# EAGLE board panelized (EAGLE 5.07)
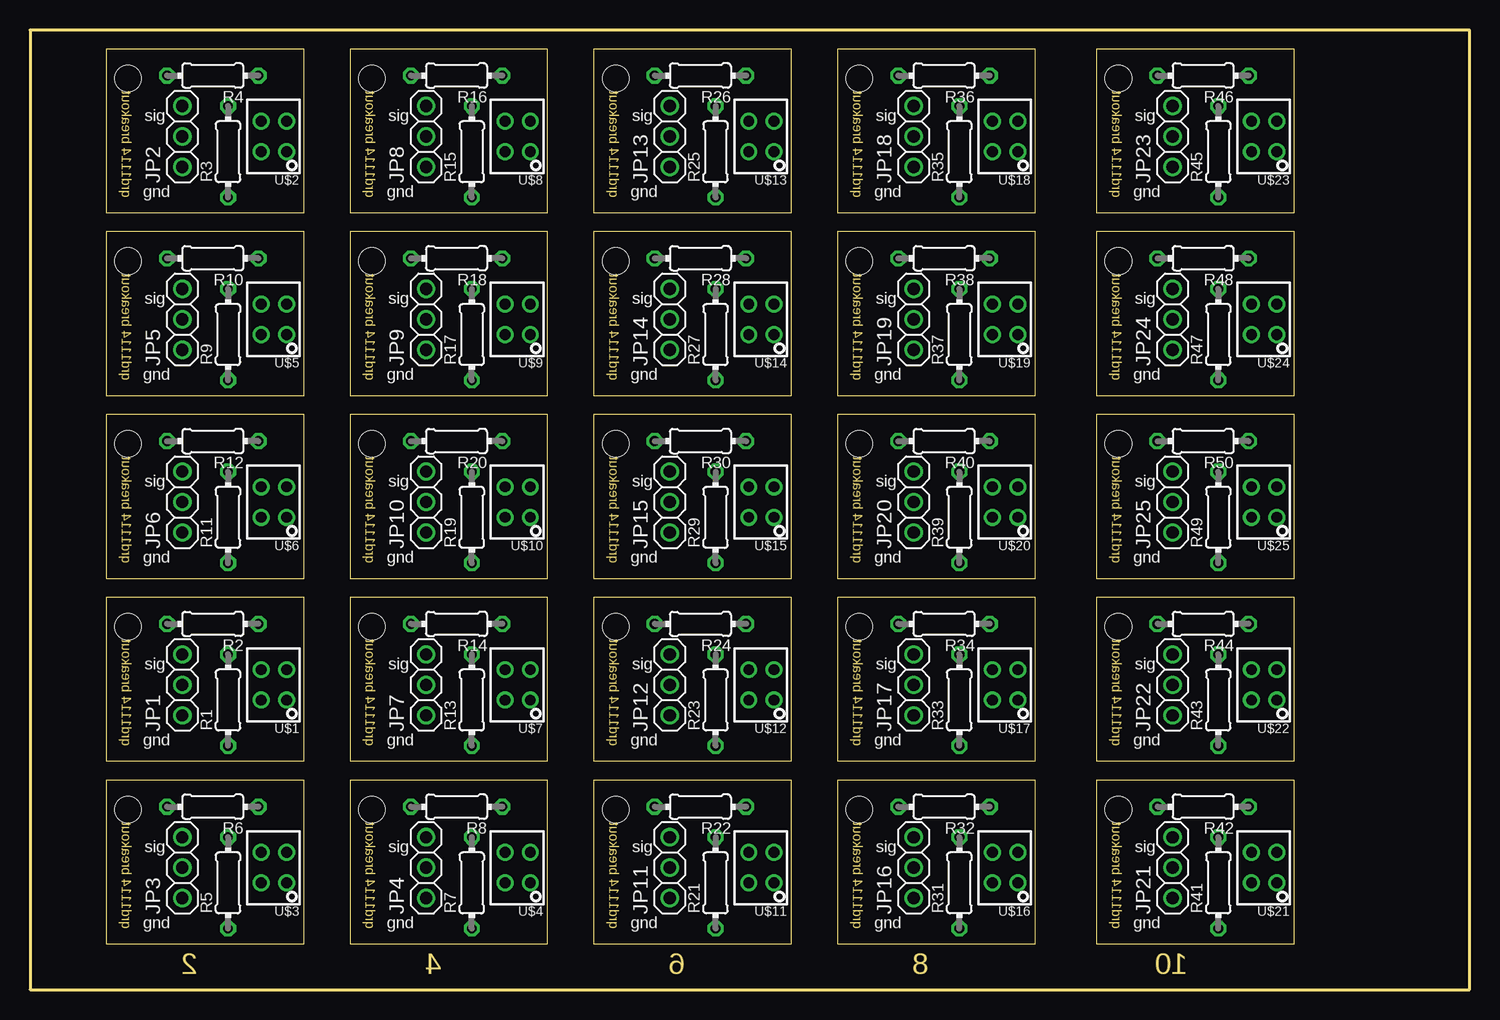
[diagram p0: board, top side]
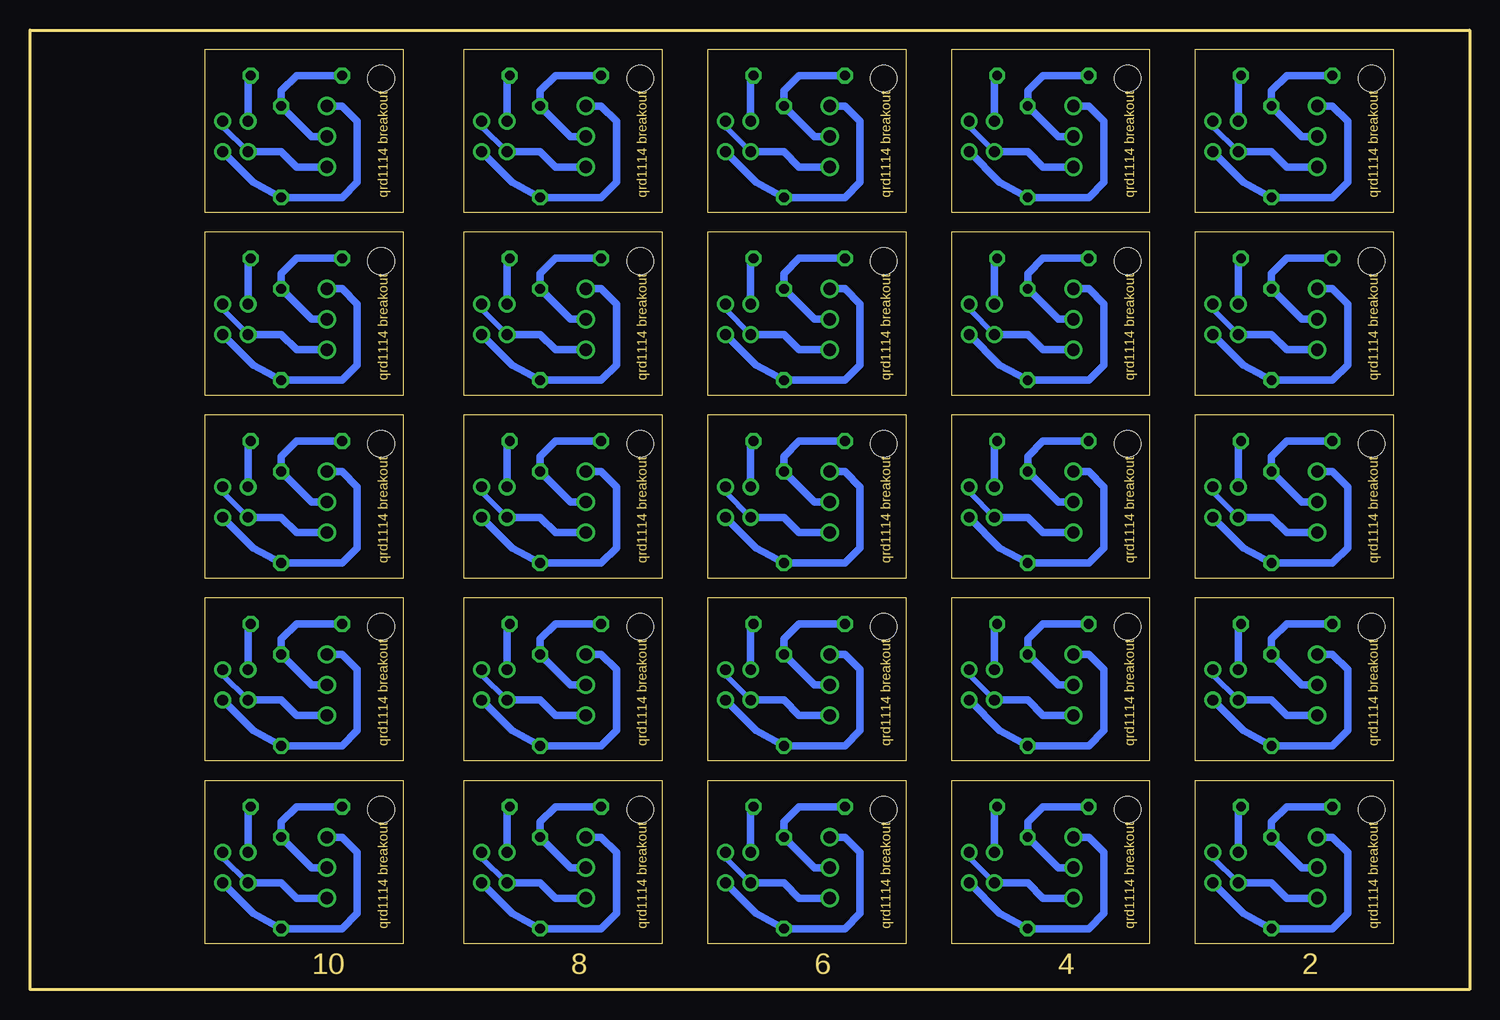
[diagram p1: board, bottom side, seen from below]

Size 120 x 80 mm. Coordinates in mm from the lower left corner, seen from the top.
Outline: 6.35,19.05 22.84,19.05 22.84,32.69 6.35,32.69 6.35,19.05
Outline: 6.35,64.77 22.84,64.77 22.84,78.41 6.35,78.41 6.35,64.77
Outline: 6.35,3.81 22.84,3.81 22.84,17.45 6.35,17.45 6.35,3.81
Outline: 26.67,3.81 43.16,3.81 43.16,17.45 26.67,17.45 26.67,3.81
Outline: 6.35,49.53 22.84,49.53 22.84,63.17 6.35,63.17 6.35,49.53
Outline: 6.35,34.29 22.84,34.29 22.84,47.93 6.35,47.93 6.35,34.29
Outline: 0,0 120,0 120,80 0,80 0,0
Outline: 26.67,19.05 43.16,19.05 43.16,32.69 26.67,32.69 26.67,19.05
Outline: 26.67,64.77 43.16,64.77 43.16,78.41 26.67,78.41 26.67,64.77
Outline: 26.67,49.53 43.16,49.53 43.16,63.17 26.67,63.17 26.67,49.53
Outline: 26.67,34.29 43.16,34.29 43.16,47.93 26.67,47.93 26.67,34.29
Outline: 46.99,3.81 63.48,3.81 63.48,17.45 46.99,17.45 46.99,3.81
Outline: 46.99,19.05 63.48,19.05 63.48,32.69 46.99,32.69 46.99,19.05
Outline: 46.99,64.77 63.48,64.77 63.48,78.41 46.99,78.41 46.99,64.77
Outline: 46.99,49.53 63.48,49.53 63.48,63.17 46.99,63.17 46.99,49.53
Outline: 46.99,34.29 63.48,34.29 63.48,47.93 46.99,47.93 46.99,34.29
Outline: 67.31,3.81 83.8,3.81 83.8,17.45 67.31,17.45 67.31,3.81
Outline: 67.31,19.05 83.8,19.05 83.8,32.69 67.31,32.69 67.31,19.05
Outline: 67.31,64.77 83.8,64.77 83.8,78.41 67.31,78.41 67.31,64.77
Outline: 67.31,49.53 83.8,49.53 83.8,63.17 67.31,63.17 67.31,49.53
Outline: 67.31,34.29 83.8,34.29 83.8,47.93 67.31,47.93 67.31,34.29
Outline: 88.9,3.81 105.39,3.81 105.39,17.45 88.9,17.45 88.9,3.81
Outline: 88.9,19.05 105.39,19.05 105.39,32.69 88.9,32.69 88.9,19.05
Outline: 88.9,64.77 105.39,64.77 105.39,78.41 88.9,78.41 88.9,64.77
Outline: 88.9,49.53 105.39,49.53 105.39,63.17 88.9,63.17 88.9,49.53
Outline: 88.9,34.29 105.39,34.29 105.39,47.93 88.9,47.93 88.9,34.29
Copper layers (1*16): Top 0.035mm / dielectric 1.5mm / Bottom 0.035mm
Design rules "default": minimum track width 10mil, minimum drill 24mil, track to track 8mil, track to pad 8mil, pad to pad 8mil, via to via 8mil, smd to smd 8mil, copper to edge 40mil, drill to drill 8mil, minimum pad ring 10mil, minimum via ring 8mil, stop-mask expansion 4mil, vias tented up to drill 0mil, thermal gap 10mil
Holes 2.2 mm at 8.18,30.25 8.18,75.97 8.18,15.01 28.5,15.01 8.18,60.73 8.18,45.49 28.5,30.25 28.5,75.97 28.5,60.73 28.5,45.49 48.82,15.01 48.82,30.25 48.82,75.97 48.82,60.73 48.82,45.49 69.14,15.01 69.14,30.25 69.14,75.97 69.14,60.73 69.14,45.49 90.73,15.01 90.73,30.25 90.73,75.97 90.73,60.73 90.73,45.49

## Footprints (pad centres in the part's own frame; a part is rotated, then mirrored left to right if it is on the bottom)
1X03 = drill 1.016 round: 1 -2.54,0; 2 0,0; 3 2.54,0
0204/7 = drill 0.813 octagon: 1 -3.81,0; 2 3.81,0
QRD1114 = drill 0.9 round: 1 -1.067,1.27; 2 -1.067,-1.27; 3 1.041,-1.27; 4 1.041,1.27

## Placement (x,y rotation side)
JP1  [1X03]  12.7,25.4 90 top
JP2  [1X03]  12.7,71.12 90 top
JP3  [1X03]  12.7,10.16 90 top
JP4  [1X03]  33.02,10.16 90 top
JP5  [1X03]  12.7,55.88 90 top
JP6  [1X03]  12.7,40.64 90 top
JP7  [1X03]  33.02,25.4 90 top
JP8  [1X03]  33.02,71.12 90 top
JP9  [1X03]  33.02,55.88 90 top
JP10  [1X03]  33.02,40.64 90 top
JP11  [1X03]  53.34,10.16 90 top
JP12  [1X03]  53.34,25.4 90 top
JP13  [1X03]  53.34,71.12 90 top
JP14  [1X03]  53.34,55.88 90 top
JP15  [1X03]  53.34,40.64 90 top
JP16  [1X03]  73.66,10.16 90 top
JP17  [1X03]  73.66,25.4 90 top
JP18  [1X03]  73.66,71.12 90 top
JP19  [1X03]  73.66,55.88 90 top
JP20  [1X03]  73.66,40.64 90 top
JP21  [1X03]  95.25,10.16 90 top
JP22  [1X03]  95.25,25.4 90 top
JP23  [1X03]  95.25,71.12 90 top
JP24  [1X03]  95.25,55.88 90 top
JP25  [1X03]  95.25,40.64 90 top
R1  5.6k  [0204/7]  16.51,24.13 90 top
R2  200ohm  [0204/7]  15.24,30.48 180 top
R3  5.6k  [0204/7]  16.51,69.85 90 top
R4  200ohm  [0204/7]  15.24,76.2 180 top
R5  5.6k  [0204/7]  16.51,8.89 90 top
R6  200ohm  [0204/7]  15.24,15.24 180 top
R7  5.6k  [0204/7]  36.83,8.89 90 top
R8  200ohm  [0204/7]  35.56,15.24 180 top
R9  5.6k  [0204/7]  16.51,54.61 90 top
R10  200ohm  [0204/7]  15.24,60.96 180 top
R11  5.6k  [0204/7]  16.51,39.37 90 top
R12  200ohm  [0204/7]  15.24,45.72 180 top
R13  5.6k  [0204/7]  36.83,24.13 90 top
R14  200ohm  [0204/7]  35.56,30.48 180 top
R15  5.6k  [0204/7]  36.83,69.85 90 top
R16  200ohm  [0204/7]  35.56,76.2 180 top
R17  5.6k  [0204/7]  36.83,54.61 90 top
R18  200ohm  [0204/7]  35.56,60.96 180 top
R19  5.6k  [0204/7]  36.83,39.37 90 top
R20  200ohm  [0204/7]  35.56,45.72 180 top
R21  5.6k  [0204/7]  57.15,8.89 90 top
R22  200ohm  [0204/7]  55.88,15.24 180 top
R23  5.6k  [0204/7]  57.15,24.13 90 top
R24  200ohm  [0204/7]  55.88,30.48 180 top
R25  5.6k  [0204/7]  57.15,69.85 90 top
R26  200ohm  [0204/7]  55.88,76.2 180 top
R27  5.6k  [0204/7]  57.15,54.61 90 top
R28  200ohm  [0204/7]  55.88,60.96 180 top
R29  5.6k  [0204/7]  57.15,39.37 90 top
R30  200ohm  [0204/7]  55.88,45.72 180 top
R31  5.6k  [0204/7]  77.47,8.89 90 top
R32  200ohm  [0204/7]  76.2,15.24 180 top
R33  5.6k  [0204/7]  77.47,24.13 90 top
R34  200ohm  [0204/7]  76.2,30.48 180 top
R35  5.6k  [0204/7]  77.47,69.85 90 top
R36  200ohm  [0204/7]  76.2,76.2 180 top
R37  5.6k  [0204/7]  77.47,54.61 90 top
R38  200ohm  [0204/7]  76.2,60.96 180 top
R39  5.6k  [0204/7]  77.47,39.37 90 top
R40  200ohm  [0204/7]  76.2,45.72 180 top
R41  5.6k  [0204/7]  99.06,8.89 90 top
R42  200ohm  [0204/7]  97.79,15.24 180 top
R43  5.6k  [0204/7]  99.06,24.13 90 top
R44  200ohm  [0204/7]  97.79,30.48 180 top
R45  5.6k  [0204/7]  99.06,69.85 90 top
R46  200ohm  [0204/7]  97.79,76.2 180 top
R47  5.6k  [0204/7]  99.06,54.61 90 top
R48  200ohm  [0204/7]  97.79,60.96 180 top
R49  5.6k  [0204/7]  99.06,39.37 90 top
R50  200ohm  [0204/7]  97.79,45.72 180 top
U$1  QRD1114  [QRD1114]  20.32,25.4 180 top
U$2  QRD1114  [QRD1114]  20.32,71.12 180 top
U$3  QRD1114  [QRD1114]  20.32,10.16 180 top
U$4  QRD1114  [QRD1114]  40.64,10.16 180 top
U$5  QRD1114  [QRD1114]  20.32,55.88 180 top
U$6  QRD1114  [QRD1114]  20.32,40.64 180 top
U$7  QRD1114  [QRD1114]  40.64,25.4 180 top
U$8  QRD1114  [QRD1114]  40.64,71.12 180 top
U$9  QRD1114  [QRD1114]  40.64,55.88 180 top
U$10  QRD1114  [QRD1114]  40.64,40.64 180 top
U$11  QRD1114  [QRD1114]  60.96,10.16 180 top
U$12  QRD1114  [QRD1114]  60.96,25.4 180 top
U$13  QRD1114  [QRD1114]  60.96,71.12 180 top
U$14  QRD1114  [QRD1114]  60.96,55.88 180 top
U$15  QRD1114  [QRD1114]  60.96,40.64 180 top
U$16  QRD1114  [QRD1114]  81.28,10.16 180 top
U$17  QRD1114  [QRD1114]  81.28,25.4 180 top
U$18  QRD1114  [QRD1114]  81.28,71.12 180 top
U$19  QRD1114  [QRD1114]  81.28,55.88 180 top
U$20  QRD1114  [QRD1114]  81.28,40.64 180 top
U$21  QRD1114  [QRD1114]  102.87,10.16 180 top
U$22  QRD1114  [QRD1114]  102.87,25.4 180 top
U$23  QRD1114  [QRD1114]  102.87,71.12 180 top
U$24  QRD1114  [QRD1114]  102.87,55.88 180 top
U$25  QRD1114  [QRD1114]  102.87,40.64 180 top

## Library data of the parts
JP1-JP25 = adafruit
R1-R50 = resistor
U$1-U$25 = SparkFun

## Nets
GND: JP1.1 U$1.2 U$1.4
GND1: JP2.1 U$2.2 U$2.4
GND2: JP3.1 U$3.2 U$3.4
GND3: JP4.1 U$4.2 U$4.4
GND4: JP5.1 U$5.2 U$5.4
GND5: JP6.1 U$6.2 U$6.4
GND6: JP7.1 U$7.2 U$7.4
GND7: JP8.1 U$8.2 U$8.4
GND8: JP9.1 U$9.2 U$9.4
GND9: JP10.1 U$10.2 U$10.4
GND10: JP11.1 U$11.2 U$11.4
GND11: JP12.1 U$12.2 U$12.4
GND12: JP13.1 U$13.2 U$13.4
GND13: JP14.1 U$14.2 U$14.4
GND14: JP15.1 U$15.2 U$15.4
GND15: JP16.1 U$16.2 U$16.4
GND16: JP17.1 U$17.2 U$17.4
GND17: JP18.1 U$18.2 U$18.4
GND18: JP19.1 U$19.2 U$19.4
GND19: JP20.1 U$20.2 U$20.4
GND20: JP21.1 U$21.2 U$21.4
GND21: JP22.1 U$22.2 U$22.4
GND22: JP23.1 U$23.2 U$23.4
GND23: JP24.1 U$24.2 U$24.4
GND24: JP25.1 U$25.2 U$25.4
N$1: R2.1 U$1.3
N$2: JP1.3 R1.1 U$1.1
N$3: JP2.3 R3.1 U$2.1
N$4: R4.1 U$2.3
N$5: JP3.3 R5.1 U$3.1
N$6: R6.1 U$3.3
N$7: JP4.3 R7.1 U$4.1
N$8: R8.1 U$4.3
N$9: JP5.3 R9.1 U$5.1
N$10: R10.1 U$5.3
N$11: JP6.3 R11.1 U$6.1
N$12: R12.1 U$6.3
N$13: JP7.3 R13.1 U$7.1
N$14: R14.1 U$7.3
N$15: JP8.3 R15.1 U$8.1
N$16: R16.1 U$8.3
N$17: JP9.3 R17.1 U$9.1
N$18: R18.1 U$9.3
N$19: JP10.3 R19.1 U$10.1
N$20: R20.1 U$10.3
N$21: JP11.3 R21.1 U$11.1
N$22: R22.1 U$11.3
N$23: JP12.3 R23.1 U$12.1
N$24: R24.1 U$12.3
N$25: JP13.3 R25.1 U$13.1
N$26: R26.1 U$13.3
N$27: JP14.3 R27.1 U$14.1
N$28: R28.1 U$14.3
N$29: JP15.3 R29.1 U$15.1
N$30: R30.1 U$15.3
N$31: JP16.3 R31.1 U$16.1
N$32: R32.1 U$16.3
N$33: JP17.3 R33.1 U$17.1
N$34: R34.1 U$17.3
N$35: JP18.3 R35.1 U$18.1
N$36: R36.1 U$18.3
N$37: JP19.3 R37.1 U$19.1
N$38: R38.1 U$19.3
N$39: JP20.3 R39.1 U$20.1
N$40: R40.1 U$20.3
N$41: JP21.3 R41.1 U$21.1
N$42: R42.1 U$21.3
N$43: JP22.3 R43.1 U$22.1
N$44: R44.1 U$22.3
N$45: JP23.3 R45.1 U$23.1
N$46: R46.1 U$23.3
N$47: JP24.3 R47.1 U$24.1
N$48: R48.1 U$24.3
N$49: JP25.3 R49.1 U$25.1
N$50: R50.1 U$25.3
VCC: JP1.2 R1.2 R2.2
VCC1: JP2.2 R3.2 R4.2
VCC2: JP3.2 R5.2 R6.2
VCC3: JP4.2 R7.2 R8.2
VCC4: JP5.2 R9.2 R10.2
VCC5: JP6.2 R11.2 R12.2
VCC6: JP7.2 R13.2 R14.2
VCC7: JP8.2 R15.2 R16.2
VCC8: JP9.2 R17.2 R18.2
VCC9: JP10.2 R19.2 R20.2
VCC10: JP11.2 R21.2 R22.2
VCC11: JP12.2 R23.2 R24.2
VCC12: JP13.2 R25.2 R26.2
VCC13: JP14.2 R27.2 R28.2
VCC14: JP15.2 R29.2 R30.2
VCC15: JP16.2 R31.2 R32.2
VCC16: JP17.2 R33.2 R34.2
VCC17: JP18.2 R35.2 R36.2
VCC18: JP19.2 R37.2 R38.2
VCC19: JP20.2 R39.2 R40.2
VCC20: JP21.2 R41.2 R42.2
VCC21: JP22.2 R43.2 R44.2
VCC22: JP23.2 R45.2 R46.2
VCC23: JP24.2 R47.2 R48.2
VCC24: JP25.2 R49.2 R50.2

## Tracks (layer width: path | path; a pad name or v marks a point on that pad's centre or on a via)
GND
  Bottom 0.406: U$1.4 21.39,26.24
  Bottom 0.61: 21.39,26.24 U$1.2 | U$1.4 16.51,24.13 15.24,22.86 JP1.1
GND1
  Bottom 0.406: U$2.4 21.39,71.96
  Bottom 0.61: 21.39,71.96 U$2.2 | U$2.4 16.51,69.85 15.24,68.58 JP2.1
GND2
  Bottom 0.406: U$3.4 21.39,11
  Bottom 0.61: 21.39,11 U$3.2 | U$3.4 16.51,8.89 15.24,7.62 JP3.1
GND3
  Bottom 0.406: U$4.4 41.71,11
  Bottom 0.61: 41.71,11 U$4.2 | U$4.4 36.83,8.89 35.56,7.62 JP4.1
GND4
  Bottom 0.406: U$5.2 21.39,56.72 U$5.4
  Bottom 0.61: U$5.4 16.51,54.61 15.24,53.34 JP5.1
GND5
  Bottom 0.406: U$6.4 21.39,41.48
  Bottom 0.61: 21.39,41.48 U$6.2 | U$6.4 16.51,39.37 15.24,38.1 JP6.1
GND6
  Bottom 0.406: U$7.4 41.71,26.24
  Bottom 0.61: 41.71,26.24 U$7.2 | U$7.4 36.83,24.13 35.56,22.86 JP7.1
GND7
  Bottom 0.406: U$8.4 41.71,71.96
  Bottom 0.61: 41.71,71.96 U$8.2 | U$8.4 36.83,69.85 35.56,68.58 JP8.1
GND8
  Bottom 0.406: U$9.4 41.71,56.72
  Bottom 0.61: 41.71,56.72 U$9.2 | U$9.4 36.83,54.61 35.56,53.34 JP9.1
GND9
  Bottom 0.406: U$10.4 41.71,41.48
  Bottom 0.61: 41.71,41.48 U$10.2 | U$10.4 36.83,39.37 35.56,38.1 JP10.1
GND10
  Bottom 0.406: U$11.4 62.03,11
  Bottom 0.61: 62.03,11 U$11.2 | U$11.4 57.15,8.89 55.88,7.62 JP11.1
GND11
  Bottom 0.406: U$12.4 62.03,26.24
  Bottom 0.61: 62.03,26.24 U$12.2 | U$12.4 57.15,24.13 55.88,22.86 JP12.1
GND12
  Bottom 0.406: U$13.4 62.03,71.96
  Bottom 0.61: 62.03,71.96 U$13.2 | U$13.4 57.15,69.85 55.88,68.58 JP13.1
GND13
  Bottom 0.406: U$14.4 62.03,56.72
  Bottom 0.61: 62.03,56.72 U$14.2 | U$14.4 57.15,54.61 55.88,53.34 JP14.1
GND14
  Bottom 0.406: U$15.4 62.03,41.48
  Bottom 0.61: 62.03,41.48 U$15.2 | U$15.4 57.15,39.37 55.88,38.1 JP15.1
GND15
  Bottom 0.406: U$16.4 82.35,11
  Bottom 0.61: 82.35,11 U$16.2 | U$16.4 77.47,8.89 76.2,7.62 JP16.1
GND16
  Bottom 0.406: U$17.4 82.35,26.24
  Bottom 0.61: 82.35,26.24 U$17.2 | U$17.4 77.47,24.13 76.2,22.86 JP17.1
GND17
  Bottom 0.406: U$18.4 82.35,71.96
  Bottom 0.61: 82.35,71.96 U$18.2 | U$18.4 77.47,69.85 76.2,68.58 JP18.1
GND18
  Bottom 0.406: U$19.4 82.35,56.72
  Bottom 0.61: 82.35,56.72 U$19.2 | U$19.4 77.47,54.61 76.2,53.34 JP19.1
GND19
  Bottom 0.406: U$20.4 82.35,41.48
  Bottom 0.61: 82.35,41.48 U$20.2 | U$20.4 77.47,39.37 76.2,38.1 JP20.1
GND20
  Bottom 0.406: U$21.4 103.94,11
  Bottom 0.61: 103.94,11 U$21.2 | U$21.4 99.06,8.89 97.79,7.62 JP21.1
GND21
  Bottom 0.406: U$22.4 103.94,26.24
  Bottom 0.61: 103.94,26.24 U$22.2 | U$22.4 99.06,24.13 97.79,22.86 JP22.1
GND22
  Bottom 0.406: U$23.4 103.94,71.96
  Bottom 0.61: 103.94,71.96 U$23.2 | U$23.4 99.06,69.85 97.79,68.58 JP23.1
GND23
  Bottom 0.406: U$24.4 103.94,56.72
  Bottom 0.61: 103.94,56.72 U$24.2 | U$24.4 99.06,54.61 97.79,53.34 JP24.1
GND24
  Bottom 0.406: U$25.4 103.94,41.48
  Bottom 0.61: 103.94,41.48 U$25.2 | U$25.4 99.06,39.37 97.79,38.1 JP25.1
N$1
  Bottom 0.61: U$1.3 19.28,30.71 R2.1
N$2
  Bottom 0.61: U$1.1 18.85,21.59 R1.1 11.43,20.32 10.16,21.59 10.16,26.67 11.43,27.94 JP1.3
N$3
  Bottom 0.61: U$2.1 18.85,67.31 R3.1 11.43,66.04 10.16,67.31 10.16,72.39 11.43,73.66 JP2.3
N$4
  Bottom 0.61: U$2.3 19.28,76.43 R4.1
N$5
  Bottom 0.61: U$3.1 18.85,6.35 R5.1 11.43,5.08 10.16,6.35 10.16,11.43 11.43,12.7 JP3.3
N$6
  Bottom 0.61: U$3.3 19.28,15.47 R6.1
N$7
  Bottom 0.61: U$4.1 39.17,6.35 R7.1 31.75,5.08 30.48,6.35 30.48,11.43 31.75,12.7 JP4.3
N$8
  Bottom 0.61: U$4.3 39.6,15.47 R8.1
N$9
  Bottom 0.61: U$5.1 18.85,52.07 R9.1 11.43,50.8 10.16,52.07 10.16,57.15 11.43,58.42 JP5.3
N$10
  Bottom 0.61: U$5.3 19.28,61.19 R10.1
N$11
  Bottom 0.61: U$6.1 18.85,36.83 R11.1 11.43,35.56 10.16,36.83 10.16,41.91 11.43,43.18 JP6.3
N$12
  Bottom 0.61: U$6.3 19.28,45.95 R12.1
N$13
  Bottom 0.61: U$7.1 39.17,21.59 R13.1 31.75,20.32 30.48,21.59 30.48,26.67 31.75,27.94 JP7.3
N$14
  Bottom 0.61: U$7.3 39.6,30.71 R14.1
N$15
  Bottom 0.61: U$8.1 39.17,67.31 R15.1 31.75,66.04 30.48,67.31 30.48,72.39 31.75,73.66 JP8.3
N$16
  Bottom 0.61: U$8.3 39.6,76.43 R16.1
N$17
  Bottom 0.61: U$9.1 39.17,52.07 R17.1 31.75,50.8 30.48,52.07 30.48,57.15 31.75,58.42 JP9.3
N$18
  Bottom 0.61: U$9.3 39.6,61.19 R18.1
N$19
  Bottom 0.61: U$10.1 39.17,36.83 R19.1 31.75,35.56 30.48,36.83 30.48,41.91 31.75,43.18 JP10.3
N$20
  Bottom 0.61: U$10.3 39.6,45.95 R20.1
N$21
  Bottom 0.61: U$11.1 59.49,6.35 R21.1 52.07,5.08 50.8,6.35 50.8,11.43 52.07,12.7 JP11.3
N$22
  Bottom 0.61: U$11.3 59.92,15.47 R22.1
N$23
  Bottom 0.61: U$12.1 59.49,21.59 R23.1 52.07,20.32 50.8,21.59 50.8,26.67 52.07,27.94 JP12.3
N$24
  Bottom 0.61: U$12.3 59.92,30.71 R24.1
N$25
  Bottom 0.61: U$13.1 59.49,67.31 R25.1 52.07,66.04 50.8,67.31 50.8,72.39 52.07,73.66 JP13.3
N$26
  Bottom 0.61: U$13.3 59.92,76.43 R26.1
N$27
  Bottom 0.61: U$14.1 59.49,52.07 R27.1 52.07,50.8 50.8,52.07 50.8,57.15 52.07,58.42 JP14.3
N$28
  Bottom 0.61: U$14.3 59.92,61.19 R28.1
N$29
  Bottom 0.61: U$15.1 59.49,36.83 R29.1 52.07,35.56 50.8,36.83 50.8,41.91 52.07,43.18 JP15.3
N$30
  Bottom 0.61: U$15.3 59.92,45.95 R30.1
N$31
  Bottom 0.61: U$16.1 79.81,6.35 R31.1 72.39,5.08 71.12,6.35 71.12,11.43 72.39,12.7 JP16.3
N$32
  Bottom 0.61: U$16.3 80.24,15.47 R32.1
N$33
  Bottom 0.61: U$17.1 79.81,21.59 R33.1 72.39,20.32 71.12,21.59 71.12,26.67 72.39,27.94 JP17.3
N$34
  Bottom 0.61: U$17.3 80.24,30.71 R34.1
N$35
  Bottom 0.61: U$18.1 79.81,67.31 R35.1 72.39,66.04 71.12,67.31 71.12,72.39 72.39,73.66 JP18.3
N$36
  Bottom 0.61: U$18.3 80.24,76.43 R36.1
N$37
  Bottom 0.61: U$19.1 79.81,52.07 R37.1 72.39,50.8 71.12,52.07 71.12,57.15 72.39,58.42 JP19.3
N$38
  Bottom 0.61: U$19.3 80.24,61.19 R38.1
N$39
  Bottom 0.61: U$20.1 79.81,36.83 R39.1 72.39,35.56 71.12,36.83 71.12,41.91 72.39,43.18 JP20.3
N$40
  Bottom 0.61: U$20.3 80.24,45.95 R40.1
N$41
  Bottom 0.61: U$21.1 101.4,6.35 R41.1 93.98,5.08 92.71,6.35 92.71,11.43 93.98,12.7 JP21.3
N$42
  Bottom 0.61: U$21.3 101.83,15.47 R42.1
N$43
  Bottom 0.61: U$22.1 101.4,21.59 R43.1 93.98,20.32 92.71,21.59 92.71,26.67 93.98,27.94 JP22.3
N$44
  Bottom 0.61: U$22.3 101.83,30.71 R44.1
N$45
  Bottom 0.61: U$23.1 101.4,67.31 R45.1 93.98,66.04 92.71,67.31 92.71,72.39 93.98,73.66 JP23.3
N$46
  Bottom 0.61: U$23.3 101.83,76.43 R46.1
N$47
  Bottom 0.61: U$24.1 101.4,52.07 R47.1 93.98,50.8 92.71,52.07 92.71,57.15 93.98,58.42 JP24.3
N$48
  Bottom 0.61: U$24.3 101.83,61.19 R48.1
N$49
  Bottom 0.61: U$25.1 101.4,36.83 R49.1 93.98,35.56 92.71,36.83 92.71,41.91 93.98,43.18 JP25.3
N$50
  Bottom 0.61: U$25.3 101.83,45.95 R50.1
VCC
  Bottom 0.61: JP1.2 13.97,25.4 R1.2 16.51,29.21 15.24,30.48 R2.2
VCC1
  Bottom 0.61: JP2.2 13.97,71.12 R3.2 16.51,74.93 15.24,76.2 R4.2
VCC2
  Bottom 0.61: JP3.2 13.97,10.16 R5.2 16.51,13.97 15.24,15.24 R6.2
VCC3
  Bottom 0.61: JP4.2 34.29,10.16 R7.2 36.83,13.97 35.56,15.24 R8.2
VCC4
  Bottom 0.61: JP5.2 13.97,55.88 R9.2 16.51,59.69 15.24,60.96 R10.2
VCC5
  Bottom 0.61: JP6.2 13.97,40.64 R11.2 16.51,44.45 15.24,45.72 R12.2
VCC6
  Bottom 0.61: JP7.2 34.29,25.4 R13.2 36.83,29.21 35.56,30.48 R14.2
VCC7
  Bottom 0.61: JP8.2 34.29,71.12 R15.2 36.83,74.93 35.56,76.2 R16.2
VCC8
  Bottom 0.61: JP9.2 34.29,55.88 R17.2 36.83,59.69 35.56,60.96 R18.2
VCC9
  Bottom 0.61: JP10.2 34.29,40.64 R19.2 36.83,44.45 35.56,45.72 R20.2
VCC10
  Bottom 0.61: JP11.2 54.61,10.16 R21.2 57.15,13.97 55.88,15.24 R22.2
VCC11
  Bottom 0.61: JP12.2 54.61,25.4 R23.2 57.15,29.21 55.88,30.48 R24.2
VCC12
  Bottom 0.61: JP13.2 54.61,71.12 R25.2 57.15,74.93 55.88,76.2 R26.2
VCC13
  Bottom 0.61: JP14.2 54.61,55.88 R27.2 57.15,59.69 55.88,60.96 R28.2
VCC14
  Bottom 0.61: JP15.2 54.61,40.64 R29.2 57.15,44.45 55.88,45.72 R30.2
VCC15
  Bottom 0.61: JP16.2 74.93,10.16 R31.2 77.47,13.97 76.2,15.24 R32.2
VCC16
  Bottom 0.61: JP17.2 74.93,25.4 R33.2 77.47,29.21 76.2,30.48 R34.2
VCC17
  Bottom 0.61: JP18.2 74.93,71.12 R35.2 77.47,74.93 76.2,76.2 R36.2
VCC18
  Bottom 0.61: JP19.2 74.93,55.88 R37.2 77.47,59.69 76.2,60.96 R38.2
VCC19
  Bottom 0.61: JP20.2 74.93,40.64 R39.2 77.47,44.45 76.2,45.72 R40.2
VCC20
  Bottom 0.61: JP21.2 96.52,10.16 R41.2 99.06,13.97 97.79,15.24 R42.2
VCC21
  Bottom 0.61: JP22.2 96.52,25.4 R43.2 99.06,29.21 97.79,30.48 R44.2
VCC22
  Bottom 0.61: JP23.2 96.52,71.12 R45.2 99.06,74.93 97.79,76.2 R46.2
VCC23
  Bottom 0.61: JP24.2 96.52,55.88 R47.2 99.06,59.69 97.79,60.96 R48.2
VCC24
  Bottom 0.61: JP25.2 96.52,40.64 R49.2 99.06,44.45 97.79,45.72 R50.2

## Text on the board
Dimension: qrd1114 breakout | qrd1114 breakout | qrd1114 breakout | qrd1114 breakout | qrd1114 breakout | qrd1114 breakout | qrd1114 breakout | qrd1114 breakout | qrd1114 breakout | qrd1114 breakout | qrd1114 breakout | qrd1114 breakout | qrd1114 breakout | qrd1114 breakout | qrd1114 breakout | qrd1114 breakout | qrd1114 breakout | qrd1114 breakout | qrd1114 breakout | qrd1114 breakout | qrd1114 breakout | qrd1114 breakout | qrd1114 breakout | qrd1114 breakout | qrd1114 breakout | 2 | 4 | 6 | 8 | 10
tPlace: sig | sig | sig | sig | sig | gnd | gnd | gnd | gnd | gnd | sig | sig | sig | sig | sig | gnd | gnd | gnd | gnd | gnd | sig | sig | sig | sig | sig | gnd | gnd | gnd | gnd | gnd | sig | sig | sig | sig | sig | gnd | gnd | gnd | gnd | gnd | sig | sig | sig | sig | sig | gnd | gnd | gnd | gnd | gnd
_tNames: R2 | R2 | R2 | R2 | R2 | U$1 | U$1 | U$1 | U$1 | U$1 | JP1 | R1 | JP1 | R1 | JP1 | R1 | JP1 | R1 | JP1 | R1 | R2 | R2 | R2 | R2 | R2 | U$1 | U$1 | U$1 | U$1 | U$1 | JP1 | R1 | JP1 | R1 | JP1 | R1 | JP1 | R1 | JP1 | R1 | R2 | R2 | R2 | R2 | R2 | JP1 | R1 | U$1 | JP1 | R1 | U$1 | JP1 | R1 | U$1 | JP1 | R1 | U$1 | JP1 | R1 | U$1 | R2 | R2 | R2 | R2 | R2 | JP1 | R1 | U$1 | JP1 | R1 | U$1 | JP1 | R1 | U$1 | JP1 | R1 | U$1 | JP1 | R1 | U$1 | R2 | R2 | R2 | R2 | R2 | U$1 | U$1 | U$1 | U$1 | U$1 | JP1 | R1 | JP1 | R1 | JP1 | R1 | JP1 | R1 | JP1 | R1